# Altium PCB PCB4.pcbdoc
Units mil, origin at the board's own origin, x right, y up, seen from the top; angles counter-clockwise.
Board outline 8374.02 x 3816.29 mil, 2 copper layers (Top Layer, Bottom Layer); 98 components, 116 nets, 382 pads, 72 vias.
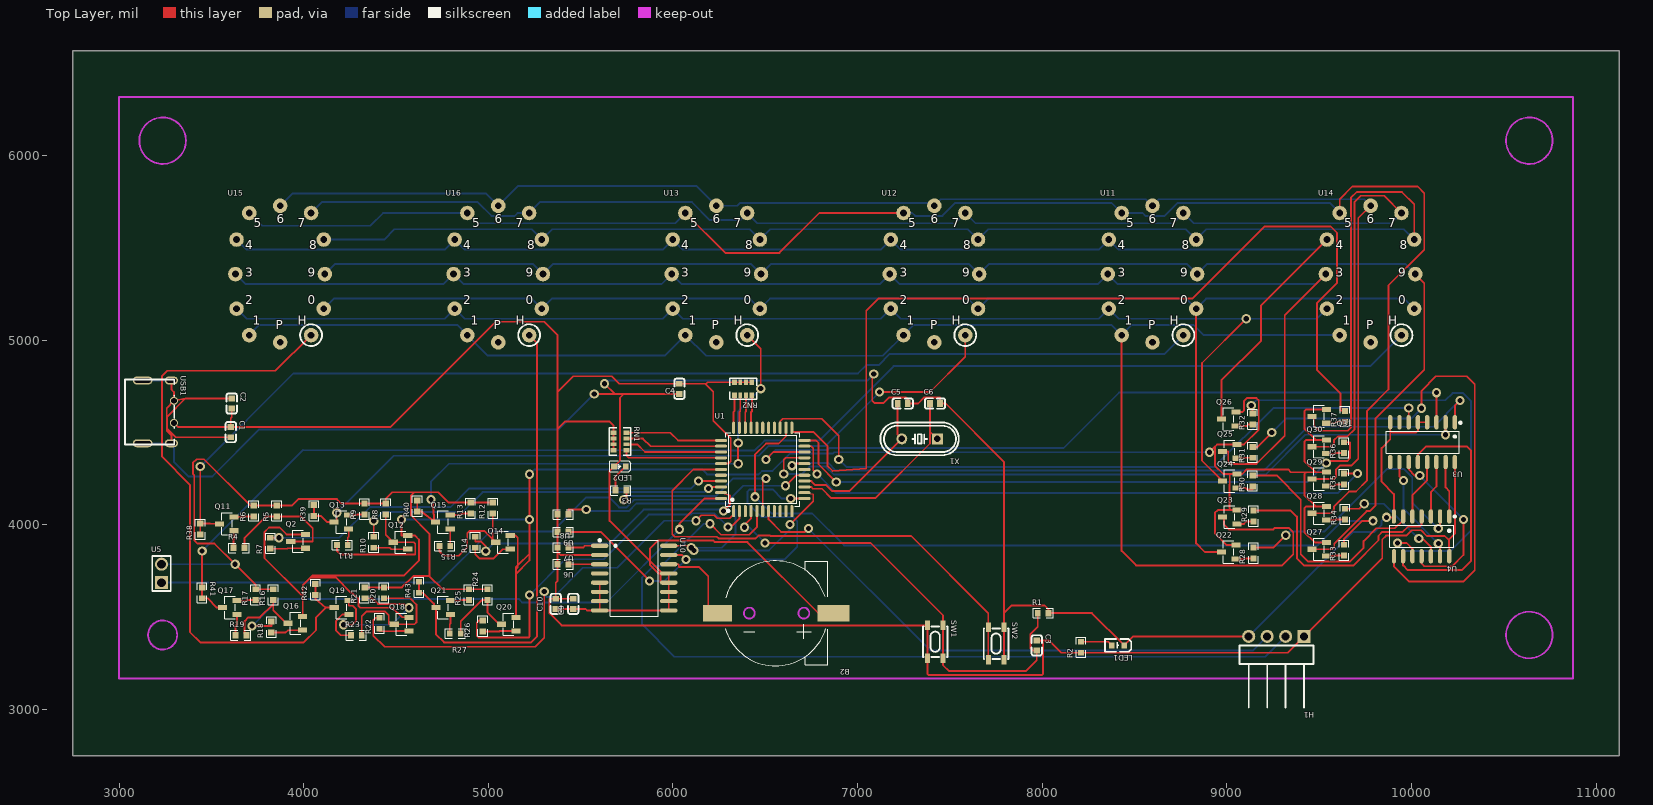
[diagram p0: Top Layer view]
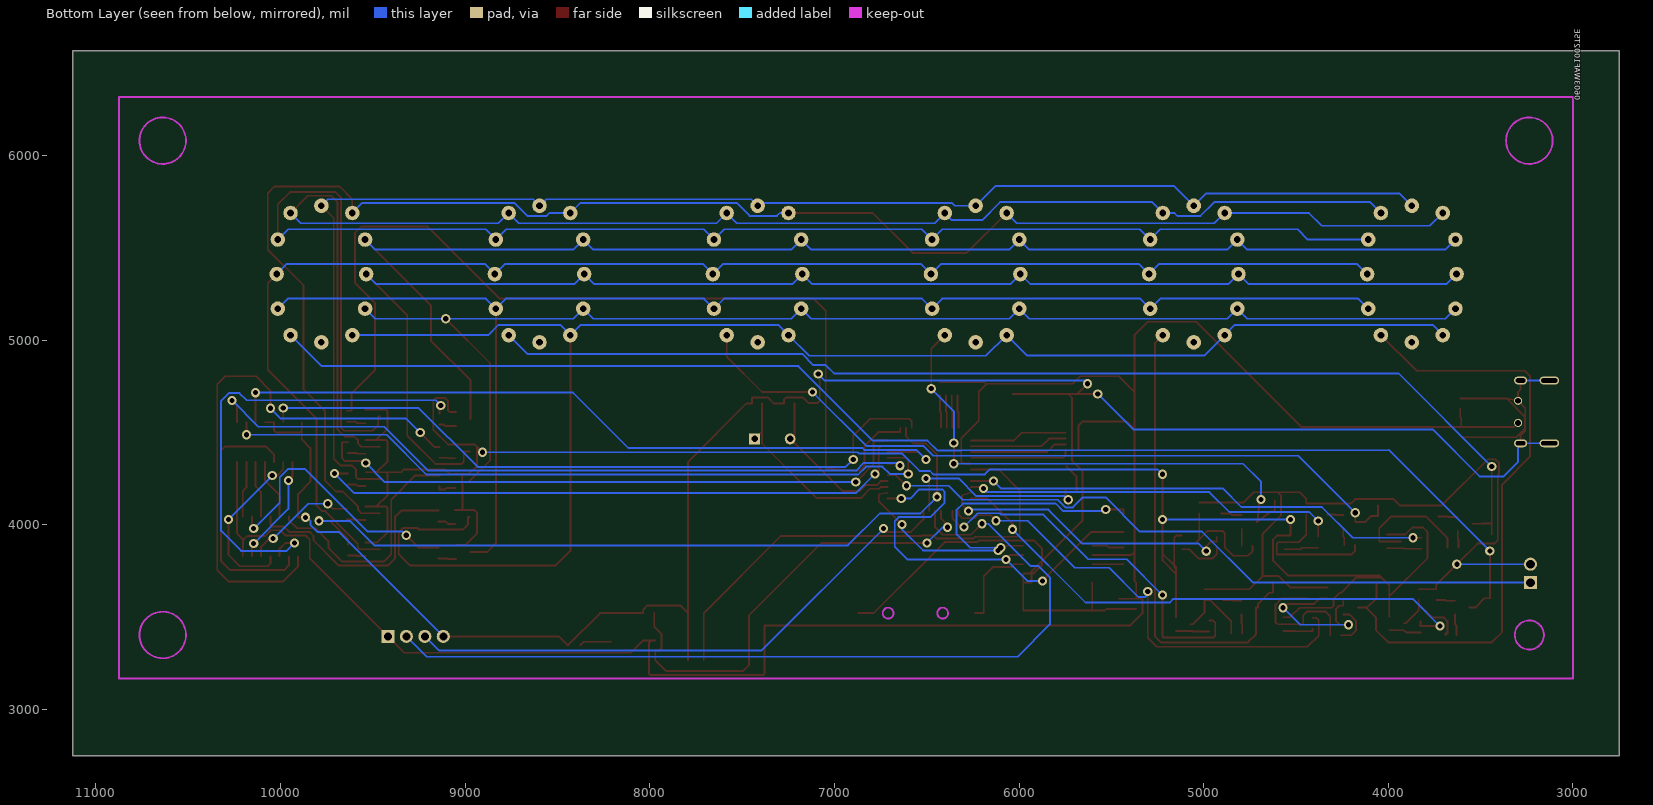
[diagram p1: Bottom Layer view, seen from below]

## Layer stack, top to bottom
Top Solder Mask Layer: solder mask 0.4, Solder Resist, Dk 3.5
Top Layer: signal copper 1.4
Dielectric1: dielectric 12.6, FR-4, Dk 4.8
Bottom Layer: signal copper 1.4
Bottom Solder Mask Layer: solder mask 0.4, Solder Resist, Dk 3.5

## Board outline
11124.02,2750 2750,2750 2750,6566.29 11124.02,6566.29

## Design rules (kind name [scope] priority, off if disabled: settings)
AssemblyTestPointUsage [All] p0: scope1count=1 scope1_0_kind=Board scope1_0_value=Board scope2count=1 scope2_0_kind=Board scope2_0_value=Board commentlength=0
AssemblyTestpoint [All] p0: scope1count=1 scope1_0_kind=Board scope1_0_value=Board scope2count=1 scope2_0_kind=Board scope2_0_value=Board commentlength=0
Clearance [All] p0: scope1count=1 scope1_0_kind=Board scope1_0_value=Board scope2count=1 scope2_0_kind=Board scope2_0_value=Board commentlength=0 gap=10
Clearance [All] p1: gap=10 ignorepadtopadclearanceinfootprint=FALSE except(0: Arc-Hole Track-Hole SMDPad-Hole THPad-Hole Via-Hole Fill-Hole Poly-Hole Region-Hole Text-Hole)
ComponentClearance [All] p0: scope1count=1 scope1_0_kind=Board scope1_0_value=Board scope2count=1 scope2_0_kind=Board scope2_0_value=Board commentlength=0 gap=10 collisioncheckmode=3
DiffPairsRouting [All] p0: scope1count=1 scope1_0_kind=Board scope1_0_value=Board scope2count=1 scope2_0_kind=Board scope2_0_value=Board commentlength=0
FabricationTestPointUsage [All] p0: scope1count=1 scope1_0_kind=Board scope1_0_value=Board scope2count=1 scope2_0_kind=Board scope2_0_value=Board commentlength=0 valid=0 allowmultiple=FALSE
FabricationTestpoint [All] p0: scope1count=1 scope1_0_kind=Board scope1_0_value=Board scope2count=1 scope2_0_kind=Board scope2_0_value=Board commentlength=0 side=3 testpointundercomponent=TRUE minsize=40 maxsize=100 preferedsize=60 minholesize=0 maxholesize=40 preferedholesize=32 testpointgrid=1
FanoutControl Fanout_BGA [All] p0 off: scope1count=1 scope1_0_kind=Board scope1_0_value=Board scope2count=1 scope2_0_kind=Board scope2_0_value=Board commentlength=69 // Protel DXP Scope 1 Expression Was: IsBGA   Fanout_BGA (Default Rule)
FanoutControl Fanout_LCC [All] p0 off: scope1count=1 scope1_0_kind=Board scope1_0_value=Board scope2count=1 scope2_0_kind=Board scope2_0_value=Board commentlength=69 // Protel DXP Scope 1 Expression Was: IsLCC   Fanout_LCC (Default Rule)
FanoutControl Fanout_SOIC [All] p0 off: scope1count=1 scope1_0_kind=Board scope1_0_value=Board scope2count=1 scope2_0_kind=Board scope2_0_value=Board commentlength=71 // Protel DXP Scope 1 Expression Was: IsSOIC   Fanout_SOIC (Default Rule)
FanoutControl Fanout_Small [All] p0 off: scope1count=1 scope1_0_kind=Board scope1_0_value=Board scope2count=1 scope2_0_kind=Board scope2_0_value=Board commentlength=84 // Protel DXP Scope 1 Expression Was: (CompPinCount < 5)   Fanout_Small (Default Rule)
FanoutControl Fanout_Default [All] p0: scope1count=1 scope1_0_kind=Board scope1_0_value=Board scope2count=1 scope2_0_kind=Board scope2_0_value=Board commentlength=30 // Fanout_Default (Default Rule)
Height [All] p0: scope1count=1 scope1_0_kind=Board scope1_0_value=Board scope2count=1 scope2_0_kind=Board scope2_0_value=Board commentlength=0
HoleSize [All] p0: scope1count=1 scope1_0_kind=Board scope1_0_value=Board scope2count=1 scope2_0_kind=Board scope2_0_value=Board commentlength=0 absolutevalues=TRUE maxlimit=100 minlimit=1 maxpercent=80.000 minpercent=20.000
HoleToHoleClearance [All] p0: scope1count=1 scope1_0_kind=Board scope1_0_value=Board scope2count=1 scope2_0_kind=Board scope2_0_value=Board commentlength=0
LayerPairs [All] p0: scope1count=1 scope1_0_kind=Board scope1_0_value=Board scope2count=1 scope2_0_kind=Board scope2_0_value=Board commentlength=0 enforce=TRUE
MinimumSolderMaskSliver [All] p0: scope1count=1 scope1_0_kind=Board scope1_0_value=Board scope2count=1 scope2_0_kind=Board scope2_0_value=Board commentlength=0
NetAntennae [All] p0: scope1count=1 scope1_0_kind=Board scope1_0_value=Board scope2count=1 scope2_0_kind=Board scope2_0_value=Board commentlength=0
PasteMaskExpansion [All] p0: scope1count=1 scope1_0_kind=Board scope1_0_value=Board scope2count=1 scope2_0_kind=Board scope2_0_value=Board commentlength=0 expansion=0
PlaneClearance [All] p0: scope1count=1 scope1_0_kind=Board scope1_0_value=Board scope2count=1 scope2_0_kind=Board scope2_0_value=Board commentlength=0 clearance=20
PlaneConnect [All] p0: scope1count=1 scope1_0_kind=Board scope1_0_value=Board scope2count=1 scope2_0_kind=Board scope2_0_value=Board commentlength=0 planeconnectstyle=Relief reliefexpansion=20 reliefentries=4 reliefconductorwidth=10 reliefairgap=10
PolygonConnect [All] p0: scope1count=1 scope1_0_kind=Board scope1_0_value=Board scope2count=1 scope2_0_kind=Board scope2_0_value=Board commentlength=0 connectstyle=Relief reliefconductorwidth=10 reliefentries=4 polygonreliefangle="90 Angle"
PolygonConnect [All] p1: connectstyle=Relief reliefconductorwidth=10 reliefentries=4 polygonreliefangle="90 Angle" airgapwidth=10
RoutingCorners [All] p0: scope1count=1 scope1_0_kind=Board scope1_0_value=Board scope2count=1 scope2_0_kind=Board scope2_0_value=Board commentlength=0 cornerstyle=45-Degree minsetback=100 maxsetback=100
RoutingLayers [All] p0: scope1count=1 scope1_0_kind=Board scope1_0_value=Board scope2count=1 scope2_0_kind=Board scope2_0_value=Board commentlength=0 top layer=Automatic bottom layer=Automatic
RoutingPriority [All] p0: scope1count=1 scope1_0_kind=Board scope1_0_value=Board scope2count=1 scope2_0_kind=Board scope2_0_value=Board commentlength=0
RoutingTopology [All] p0: scope1count=1 scope1_0_kind=Board scope1_0_value=Board scope2count=1 scope2_0_kind=Board scope2_0_value=Board commentlength=0 topology=Shortest
RoutingVias [All] p0: scope1count=1 scope1_0_kind=Board scope1_0_value=Board scope2count=1 scope2_0_kind=Board scope2_0_value=Board commentlength=0 holewidth=28 width=50 viastyle="Through Hole" minholewidth=28 minwidth=50 maxholewidth=28 maxwidth=50
RoutingVias [All] p1: holewidth=28 width=50 viastyle="Through Hole" minholewidth=28 minwidth=50 maxholewidth=28 maxwidth=50
ShortCircuit [All] p0: scope1count=1 scope1_0_kind=Board scope1_0_value=Board scope2count=1 scope2_0_kind=Board scope2_0_value=Board commentlength=0 allowed=FALSE
SilkToBoardRegionClearance [All] p0: scope1count=1 scope1_0_kind=Board scope1_0_value=Board scope2count=1 scope2_0_kind=Board scope2_0_value=Board commentlength=0
SilkToSilkClearance [All] p0: scope1count=1 scope1_0_kind=Board scope1_0_value=Board scope2count=1 scope2_0_kind=Board scope2_0_value=Board commentlength=0
SilkToSolderMaskClearance [All] p0 off: scope1count=1 scope1_0_kind=Board scope1_0_value=Board scope2count=1 scope2_0_kind=Board scope2_0_value=Board commentlength=44 // Protel DXP Scope 1 Expression Was: IsPad
SolderMaskExpansion [All] p0: scope1count=1 scope1_0_kind=Board scope1_0_value=Board scope2count=1 scope2_0_kind=Board scope2_0_value=Board commentlength=0 expansion=4
SolderMaskExpansion [All] p1: expansion=4 istentingtop=FALSE
UnRoutedNet [All] p0: scope1count=1 scope1_0_kind=Board scope1_0_value=Board scope2count=1 scope2_0_kind=Board scope2_0_value=Board commentlength=0
UnpouredPolygon [All] p0: scope1count=1 scope1_0_kind=Board scope1_0_value=Board scope2count=1 scope2_0_kind=Board scope2_0_value=Board commentlength=0
Width [All] p0: scope1count=1 scope1_0_kind=Board scope1_0_value=Board scope2count=1 scope2_0_kind=Board scope2_0_value=Board commentlength=0 maxlimit=10 minlimit=10 preferedwidth=10
Width [All] p1: maxlimit=10 minlimit=10 preferedwidth=10
30 further rules are at their usual default settings.

## Components (designator, comment, footprint, x,y, rotation, side; value= is the part's Value field where it differs from the comment)
B2 "CR1220-2" BAT-SMD_CR1220-2 6555,3521.29 r180 top
C1 "CL10A106MP8NNNC" C0603#1 3605,4501.29 r270 top
C2 "CL10B104KB8NNNC" C0603#1 3610,4656.29 r270 top
C3 "CL10A106MP8NNNC" C0603#1 7970,3346.29 r270 top
C4 "CL10B104KB8NNNC" C0603#1 6035,4736.29 r270 top
C5 "0603CG220J500NT" C0603#1 7244.37,4656.55 r0 top
C6 "0603CG220J500NT" C0603#1 7419.37,4656.55 r0 top
C9 "CL10A105KB8NNNC" C0603#2 5460,3571.29 r90 top
C10 "CC0603KRX7R9BB104" C0603#2 5365,3571.29 r90 top
H1 "DZ254W-11-04-65" HDR-TH_4P-P2.54-H-M-W10.3 9268.04,3395.28 r180 top
LED1 "19-217/R6C-AL1M2VY/3T" LED0603-R-RD 8410,3346.29 r180 top
LED2 "LED_0603-B" LED0603-RD_BLUE 5712.81,4316.15 r180 top
Q2 "MMBTA42_C916394" SOT-23-3_L2.9-W1.3-P1.90-LS2.4-BR 3969.3,3910.05 r0 top
Q11 "MMBTA92_C916395" SOT-23-3_L2.9-W1.3-P1.90-LS2.4-BR 3584.3,4005.05 r0 top
Q12 "MMBTA42_C916394" SOT-23-3_L2.9-W1.3-P1.90-LS2.4-BR 4524.3,3905.05 r0 top
Q13 "MMBTA92_C916395" SOT-23-3_L2.9-W1.3-P1.90-LS2.4-BR 4204.3,4015.05 r0 top
Q14 "MMBTA42_C916394" SOT-23-3_L2.9-W1.3-P1.90-LS2.4-BR 5079.3,3905.05 r0 top
Q15 "MMBTA92_C916395" SOT-23-3_L2.9-W1.3-P1.90-LS2.4-BR 4754.3,4015.05 r0 top
Q16 "MMBTA42_C916394" SOT-23-3_L2.9-W1.3-P1.90-LS2.4-BR 3955,3466.29 r0 top
Q17 "MMBTA92_C916395" SOT-23-3_L2.9-W1.3-P1.90-LS2.4-BR 3600,3551.29 r0 top
Q18 "MMBTA42_C916394" SOT-23-3_L2.9-W1.3-P1.90-LS2.4-BR 4530,3461.29 r0 top
Q19 "MMBTA92_C916395" SOT-23-3_L2.9-W1.3-P1.90-LS2.4-BR 4205,3551.29 r0 top
Q20 "MMBTA42_C916394" SOT-23-3_L2.9-W1.3-P1.90-LS2.4-BR 5110,3461.29 r0 top
Q21 "MMBTA92_C916395" SOT-23-3_L2.9-W1.3-P1.90-LS2.4-BR 4755,3551.29 r0 top
Q22 "MMBTA42_C916394" SOT-23-3_L2.9-W1.3-P1.90-LS2.4-BR 9009.42,3852.28 r0 top
Q23 "MMBTA42_C916394" SOT-23-3_L2.9-W1.3-P1.90-LS2.4-BR 9014.42,4042.28 r0 top
Q24 "MMBTA42_C916394" SOT-23-3_L2.9-W1.3-P1.90-LS2.4-BR 9014.42,4237.28 r0 top
Q25 "MMBTA42_C916394" SOT-23-3_L2.9-W1.3-P1.90-LS2.4-BR 9014.42,4397.28 r0 top
Q26 "MMBTA42_C916394" SOT-23-3_L2.9-W1.3-P1.90-LS2.4-BR 9009.42,4572.28 r0 top
Q27 "MMBTA42_C916394" SOT-23-3_L2.9-W1.3-P1.90-LS2.4-BR 9499.42,3867.28 r0 top
Q28 "MMBTA42_C916394" SOT-23-3_L2.9-W1.3-P1.90-LS2.4-BR 9499.42,4062.28 r0 top
Q29 "MMBTA42_C916394" SOT-23-3_L2.9-W1.3-P1.90-LS2.4-BR 9499.42,4247.28 r0 top
Q30 "MMBTA42_C916394" SOT-23-3_L2.9-W1.3-P1.90-LS2.4-BR 9499.42,4422.28 r0 top
Q31 "MMBTA42_C916394" SOT-23-3_L2.9-W1.3-P1.90-LS2.4-BR 9499.42,4587.28 r0 top
R1 "RC0603JR-0710KL" R0603 8005,3521.29 r0 top
R2 "RC0603JR-0710KL" R0603 8210,3336.29 r90 top
R3 "RC0603JR-0710KL" R0603 5717.81,4186.15 r180 top
R4 "Res_0603" R0603 3649.3,3875.05 r0 top
R5 "Res_0603" R0603 3854.3,4075.05 r90 top
R6 "Res_0603" R0603 3729.3,4075.05 r90 top
R7 "Res_0603" R0603 3819.3,3900.05 r90 top
R8 "Res_0603" R0603 4444.3,4085.05 r90 top
R9 "Res_0603" R0603 4329.3,4085.05 r90 top
R10 "Res_0603" R0603 4379.3,3905.05 r90 top
R11 "Res_0603" R0603 4209.3,3890.05 r180 top
R12 "Res_0603" R0603 5024.3,4090.05 r90 top
R13 "Res_0603" R0603 4904.3,4090.05 r90 top
R14 "Res_0603" R0603 4929.3,3905.05 r90 top
R15 "Res_0603" R0603 4764.3,3885.05 r180 top
R16 "Res_0603" R0603 3835,3621.29 r90 top
R17 "Res_0603" R0603 3740,3621.29 r90 top
R18 "Res_0603" R0603 3825,3446.29 r90 top
R19 "Res_0603" R0603 3660,3401.29 r0 top
R20 "Res_0603" R0603 4435,3631.29 r90 top
R21 "Res_0603" R0603 4330,3631.29 r90 top
R22 "Res_0603" R0603 4410,3466.29 r90 top
R23 "Res_0603" R0603 4285,3401.29 r0 top
R24 "Res_0603" R0603 4995,3621.29 r90 top
R25 "Res_0603" R0603 4895,3621.29 r90 top
R26 "Res_0603" R0603 4970,3451.29 r90 top
R27 "Res_0603" R0603 4820.65,3411.46 r0 top
R28 "Res_0603" R0603 9144.42,3847.28 r90 top
R29 "Res_0603" R0603 9144.42,4047.28 r90 top
R30 "Res_0603" R0603 9139.42,4237.28 r90 top
R31 "Res_0603" R0603 9139.42,4392.28 r90 top
R32 "Res_0603" R0603 9139.42,4572.28 r90 top
R33 "Res_0603" R0603 9634.42,3862.28 r90 top
R34 "Res_0603" R0603 9639.42,4057.28 r90 top
R35 "Res_0603" R0603 9634.42,4247.28 r90 top
R36 "Res_0603" R0603 9634.42,4417.28 r90 top
R37 "Res_0603" R0603 9639.42,4587.28 r90 top
R38 "0603WAF1002T5E" R0603 3440,3976.29 r90 top
R39 "0603WAF1002T5E" R0603 4055,4076.29 r90 top
R40 "0603WAF1002T5E" R0603 4615,4101.29 r90 top
R41 "0603WAF1002T5E" R0603 3450,3631.29 r270 top
R42 "0603WAF1002T5E" R0603 4063.3,3649.38 r90 top
R43 "" R0603 4625,3661.29 r90 top
RN1 "yc164-jr-0710kl" res-array-smd_0603-8p-l3.2-w1.6-bl 5712.81,4451.15 r270 top
RN2 "yc164-jr-0710kl" res-array-smd_0603-8p-l3.2-w1.6-bl 6380,4736.29 r180 top
SW1 "PTS815SJK250SMTRLFS" SW-SMD_4P-L4.2-W3.3-P2.15-LS5.1 7420,3366.29 r270 top
SW2 "PTS815SJK250SMTRLFS" SW-SMD_4P-L4.2-W3.3-P2.15-LS5.1 7750,3356.29 r270 top
U1 "STC89C52RC-40I" LQFP-44_L10.0-W10.0-P0.80-LS12.0-BL 6486.04,4299.42 r0 top
U3 "74HC138D_C5205140" SOIC-16_L9.9-W3.9-P1.27-LS6.0-BL 10059.42,4447.28 r180 top
U4 "CD4069_C3041279" SOP-14_L8.8-W3.9-P1.27-LS6.0-BL 10054.42,3937.28 r180 top
U5 "54102-T0600LF" HDR-TH_2P-P2.54-V-M-R2-C1-S2.54 3230,3736.29 r0 top
U6 "AR03FTDX4701A" R0603 5405,3786.29 r180 top
U7 "AR03FTDX4701A" R0603 5405,3876.29 r180 top
U8 "AR03FTDX4701A" R0603 5405,4056.29 r180 top
U9 "AR03FTDX4701A" R0603 5405,3961.29 r180 top
U10 "DS3231SN#" SOIC-16_L10.3-W7.5-P1.27-LS10.3-BL 5790,3711.29 r270 top
U11 "IN-12A" IN-12 8596.89,5357.64 r0 top
U12 "IN-12A" IN-12 7415.79,5357.64 r0 top
U13 "IN-12A" IN-12 6234.68,5357.64 r0 top
U14 "IN-12A" IN-12 9777.99,5357.64 r0 top
U15 "IN-12A" IN-12 3872.48,5357.64 r0 top
U16 "IN-12A" IN-12 5053.58,5357.64 r0 top
USB1 "TYPE-C-31-M-33" USB-C-TH_TYPE-C-31-M-33 3212.6,4611.29 r270 top
X1 "B11059J019" HC-49US_L11.5-W4.5-P4.88 7335.49,4464.94 r180 top

## Footprints (in the part's own frame and the unit in brackets; to place one, negate y for a bottom-side part, rotate by r counter-clockwise, add the part's x,y. Pads: shape width x height; smd on the part's side, far side on the other; paste and mask are expansions set on the pad)
BAT-SMD_CR1220-2 [mm]
  rect 4.4x2.3 smd paste+0 mask+0: 1(-8,0)
  rect 4x2.3 smd paste+0 mask+0: 2(8,0)
  silkscreen extent -7.22,-7.19 6.92,7.25
C0603#1 [mm]
  rect 0.8x0.9 smd paste+0 mask+0: 1(-0.7,0) 2(0.7,0)
  silkscreen extent -1.41,-0.71 1.39,0.72
C0603#2 [mm]
  rect 0.8x0.9 smd: 1(-0.7,0) 2(0.7,0)
  silkscreen extent -1.41,-0.71 1.39,0.72
HC-49US_L11.5-W4.5-P4.88 [mil]
  rect 59.1x59.1 hole 35.4 paste+0 mask+0: 1(-96.1,0)
  round 59.1 hole 35.4 paste+0 mask+0: 2(96.1,0)
  silkscreen extent -212,-89 212,89
HDR-TH_2P-P2.54-V-M-R2-C1-S2.54 [mm]
  rect 1.8x1.8 hole 1.2: 1(0,-1.27)
  round 1.8 hole 1.2: 2(0,1.27)
  silkscreen extent -1.27,-2.41 1.27,2.41
HDR-TH_4P-P2.54-H-M-W10.3 [mm]
  rect 1.8x1.8 hole 1.1 paste+0 mask+0: 1(-3.81,0)
  round 1.8 hole 1.1 paste+0 mask+0: 2(-1.27,0) 3(1.27,0) 4(3.81,0)
  silkscreen extent -5.08,1.27 5.08,9.81
IN-12 [mm]
  round 2 hole 0.914 paste+0 mask+0: Hi(4.25,-8.4) N0(6,-4.75) N1(-4.25,-8.4) N2(-6,-4.75) N3(-6.15,0) N4(-6,4.75) N6(0,9.4) N7(4.25,8.4) N8(6,4.75) P(0,-9.4)
  round 2 hole 0.914 copper offset 0,0 paste+0 mask+0: N5(-4.25,8.4) N9(6.15,0)
  silkscreen extent 2.75,-9.9 5.75,-6.9
LED0603-R-RD [mm]
  rect 0.8x0.8 smd paste+0 mask+0: 1(0.851,0) 2(-0.851,0)
  silkscreen extent -1.82,-0.86 1.77,0.86
LED0603-RD_BLUE [mil]
  rect 31.5x31.5 smd paste+0 mask+0: 1(-31.5,-0.1) 2(31.5,0.1)
  silkscreen extent -59,-29 55,30
LQFP-44_L10.0-W10.0-P0.80-LS12.0-BL [mil]
  oval 16.5x65.7 smd paste+0 mask+0: 1(-157.5,-225.8) 2(-126,-225.8) 3(-94.5,-225.8) 4(-63,-225.8) 5(-31.5,-225.8) 6(0,-225.8) 7(31.5,-225.8) 8(63,-225.8) 9(94.5,-225.8) 10(126,-225.8) 11(157.5,-225.8) 23(157.5,225.8) 24(126,225.8) 25(94.5,225.8) 26(63,225.8) 27(31.5,225.8) 28(0,225.8) 29(-31.5,225.8) 30(-63,225.8) 31(-94.5,225.8) 32(-126,225.8) 33(-157.5,225.8)
  oval 65.7x16.5 smd paste+0 mask+0: 12(225.8,-157.5) 13(225.8,-126) 14(225.8,-94.5) 15(225.8,-63) 16(225.8,-31.5) 17(225.8,0) 18(225.8,31.5) 19(225.8,63) 20(225.8,94.5) 21(225.8,126) 22(225.8,157.5) 34(-225.8,157.5) 35(-225.8,126) 36(-225.8,94.5) 37(-225.8,63) 38(-225.8,31.5) 39(-225.8,0) 40(-225.8,-31.5) 41(-225.8,-63) 42(-225.8,-94.5) 43(-225.8,-126) 44(-225.8,-157.5)
  silkscreen extent -200,-230 200,200
R0603 [mil]
  rect 31.75x34.02 smd paste-3937.01 mask+0: 1(-29.66,0) 2(29.66,0)
  silkscreen extent -55,-26 55,26
res-array-smd_0603-8p-l3.2-w1.6-bl [mil]
  rect 25.6x31.5 smd paste+0 mask+0: 1(-47.2,-35.4) 4(47.2,-35.4) 5(47.2,35.4) 8(-47.2,35.4)
  rect 19.7x31.5 smd paste+0 mask+0: 2(-15.7,-35.4) 3(15.8,-35.4) 6(15.8,35.4) 7(-15.7,35.4)
  silkscreen extent -74,-57 74,58
SOIC-16_L9.9-W3.9-P1.27-LS6.0-BL [mil]
  oval 23.7x77.6 smd: 1(-175,-107.7) 2(-125,-107.7) 3(-75,-107.7) 4(-25,-107.7) 5(25,-107.7) 6(75,-107.7) 7(125,-107.7) 8(175,-107.7) 9(175,107.7) 10(125,107.7) 11(75,107.7) 12(25,107.7) 13(-25,107.7) 14(-75,107.7) 15(-125,107.7) 16(-175,107.7)
  silkscreen extent -211,-111 198,60
SOIC-16_L10.3-W7.5-P1.27-LS10.3-BL [mil]
  oval 22.6x94.51 smd: 1(-175,-187.02) 2(-125,-187.02) 3(-75,-187.02) 4(-25,-187.02) 5(25,-187.02) 6(75,-187.02) 7(125,-187.02) 8(175,-187.02) 9(175,187.02) 10(125,187.02) 11(75,187.02) 12(25,187.02) 13(-25,187.02) 14(-75,187.02) 15(-125,187.02) 16(-175,187.02)
  silkscreen extent -210,-193 206,131
SOP-14_L8.8-W3.9-P1.27-LS6.0-BL [mm]
  oval 0.595x1.968 smd: 1(-3.81,-2.734) 2(-2.54,-2.734) 3(-1.27,-2.734) 4(0,-2.734) 5(1.27,-2.734) 6(2.54,-2.734) 7(3.81,-2.734) 8(3.81,2.734) 9(2.54,2.734) 10(1.27,2.734) 11(0,2.734) 12(-1.27,2.734) 13(-2.54,2.734) 14(-3.81,2.734)
  silkscreen extent -4.71,-2.88 4.4,1.52
SOT-23-3_L2.9-W1.3-P1.90-LS2.4-BR [mm]
  rect 1.25x0.7 smd: 1(1,-0.95) 2(1,0.95) 3(-1,0)
  silkscreen extent -0.73,-1.53 0.73,1.53
SW-SMD_4P-L4.2-W3.3-P2.15-LS5.1 [mil]
  rect 51.2x27.6 smd paste+0 mask+0: 1(-88.6,42.3) 2(88.6,42.3) 3(-88.6,-42.3) 4(88.6,-42.3)
  silkscreen extent -83,-67 83,67
USB-C-TH_TYPE-C-31-M-33 [mm]
  oval 1.1x1.8 hole 0.6 slot 1.3 at 90 deg paste+0 mask+0: 3(4.32,1.8) 6(-4.32,1.8)
  oval 1.1x2.7 hole 0.6 slot 2.2 at 90 deg paste+0 mask+0: 4(4.32,-2.15) 5(-4.32,-2.15)
  round 1.1 hole 0.8 paste+0 mask+0: A9(1.52,2.15) B12(-1.52,2.15)
  silkscreen extent -4.47,-4.6 4.47,2.2

## Via types
v1: diameter 50, hole 28, Top Layer to Bottom Layer, 72 vias

## Nets (pads, with @x,y where several pads share a name; then routed paths per layer and width w, separated by ;. In a path a pad name is that pad's centre, name@x,y a point inside that pad or via, vN(x,y) a via of type N, cw(c..) or ccw(c..) an arc to the next point about the centre after c; other vN are vias at no path point)
32K: U7.1 U10.1 | length 172.5
  Top Layer w10: U7.1 5513,3876.29 5523,3886.29 U10.1
$1N1351: LED1.1 R2.2 | length 174.6
  Top Layer w10: R2.2 8356.84,3365.95 LED1.1
$1N1355: LED2.1 R3.2 | length 153.4
  Top Layer w10: R3.2 5688.15,4260.09 LED2.1
$1N2619: Q11.2 R6.1 | length 106.8
  Top Layer w10: Q11.2 3675,4042.45 3677.94,4045.39 R6.1
$1N2621: Q2.1 R7.1 | length 190.3
  Top Layer w10: R7.1 3912,3870.39 3914.26,3872.65 Q2.1
$1N2624: Q2.3 R4.2 R5.1 | length 687.7
  Top Layer w10: R4.2 3678.96,3927.96 3796.39,4045.39 R5.1 3983.61,4045.39 4049,3980 4049,3910.05 Q2.3
$1N2625: Q11.1 R4.1 | length 94.3
  Top Layer w10: R4.1 3619.64,3919 3623.67,3923.03 Q11.1
$1N3048: Q13.2 R9.1 | length 86.8
  Top Layer w10: Q13.2 4285,4052.45 4287.94,4055.39 R9.1
$1N3050: Q12.1 R10.1 | length 187.6
  Top Layer w10: R10.1 4467,3875.39 4474.74,3867.65 Q12.1
$1N3052: Q12.3 R8.1 R11.2 | length 813.1
  Top Layer w10: R11.2 4179.64,3858.36 4200,3838 4604,3838 4604,3897 4595.95,3905.05 Q12.3 4444.3,3945.68 R8.1
$1N3053: Q13.1 R11.1 | length 89.6
  Top Layer w10: R11.1 4238.96,3931 4243.67,3935.71 Q13.1
$1N3261: Q15.2 R13.1 | length 113.9
  Top Layer w10: Q15.2 4845,4052.45 4852.94,4060.39 R13.1
$1N3263: Q14.1 R14.1 | length 255.9
  Top Layer w10: R14.1 4929.3,3840 4953.02,3816.27 5027.74,3816.27 5079.12,3867.65 Q14.1
$1N3265: Q14.3 R12.1 R15.2 | length 608.7
  Top Layer w10: R15.2 4734.64,3857.36 4760,3832 4840,3832 4886,3878 4886,3953 4900,3967 4977.98,3967 5024.3,3920.68 ; R12.1 5024.3,3920.68 ; Q14.3 5024.3,3920.68
$1N3266: Q15.1 R15.1 | length 92.7
  Top Layer w10: Q15.1 4793.67,3931.29 4793.96,3931 R15.1
$1N3474: Q17.2 R17.1 | length 101.8
  Top Layer w10: Q17.2 3688,3588.69 3690.94,3591.63 R17.1
$1N3476: Q16.1 R18.1 | length 174.4
  Top Layer w10: R18.1 3903,3416.63 3915.26,3428.89 Q16.1
$1N3478: Q16.3 R16.1 R19.2 | length 444.6
  Top Layer w10: R19.2 3689.66,3410.18 3679.99,3410.18 3679.99,3478.19 3700,3498.19 3763.19,3498.19 3835,3570 ; R16.1 3835,3570 ; Q16.3 3905,3466.29 3835,3536.29 3835,3570
$1N3479: Q17.1 R19.1 | length 116.3
  Top Layer w10: R19.1 3630.34,3453 3639.37,3462.03 Q17.1
$1N3687: Q19.2 R21.1 | length 869.1
  Top Layer w10: v1(4216,3458) 4262,3458 4284,3480 4284,3543 4266,3561 4244,3561 4244,3588.69 Q19.2 ; R21.1 4372,3601.63 4402.88,3570.76 4545,3570.76 4565.76,3550 v1(4570,3550)
  Bottom Layer w10: v1(4216,3458) 4478,3458 v1(4570,3550)
$1N3689: Q18.1 R22.1 | length 173.4
  Top Layer w10: R22.1 4410,3423 4502,3423 4502.89,3423.89 Q18.1
$1N3691: Q18.3 R20.1 R23.2 | length 756
  Top Layer w10: R23.2 4314.66,3503.66 4341.76,3530.76 4440,3530.76 4460.72,3510.04 4460.72,3461.29 Q18.3 4600,3461.29 4610,3471.29 4610,3568 4576.37,3601.63 R20.1
$1N3692: Q19.1 R23.1 | length 227.6
  Top Layer w10: Q19.1 4208.78,3513.89 4175.34,3480.45 4175.34,3425.95 4200,3401.29 R23.1
$1N3900: Q21.2 R25.1 | length 101.8
  Top Layer w10: Q21.2 4843,3588.69 4845.94,3591.63 R25.1
$1N3902: Q20.1 R26.1 | length 180.3
  Top Layer w10: R26.1 5058,3421.63 5060.26,3423.89 Q20.1
$1N3904: Q20.3 R24.1 R27.2 | length 426.2
  Top Layer w10: R27.2 4850.31,3477.94 4964,3591.63 R24.1 4995,3526.29 5060,3461.29 Q20.3
$1N3905: Q21.1 R27.1 | length 103.8
  Top Layer w10: R27.1 4790.99,3460 4794.37,3463.38 Q21.1
$1N4218: Q22.1 R28.1 | length 96.8
  Top Layer w10: Q22.1 9095,3814.88 9097.74,3817.62 R28.1
$1N4332: Q23.1 R29.1 | length 95.9
  Top Layer w10: Q23.1 9092,4004.88 9104.74,4017.62 R29.1
$1N4415: Q24.1 R30.1 | length 107.3
  Top Layer w10: Q24.1 9099.53,4199.88 9109.42,4190 9139.42,4190 R30.1
$1N4498: Q25.1 R31.1 | length 86.8
  Top Layer w10: Q25.1 9095,4359.88 9097.74,4362.62 R31.1
$1N4581: Q26.1 R32.1 | length 93.8
  Top Layer w10: Q26.1 9108.56,4534.88 9116.3,4542.62 R32.1
$1N4664: Q27.1 R33.1 | length 96.8
  Top Layer w10: Q27.1 9585,3829.88 9587.74,3832.62 R33.1
$1N4747: Q28.1 R34.1 | length 101.8
  Top Layer w10: Q28.1 9587,4024.88 9589.74,4027.62 R34.1
$1N4830: Q29.1 R35.1 | length 98.8
  Top Layer w10: Q29.1 9582,4209.88 9589.74,4217.62 R35.1
$1N4913: Q30.1 R36.1 | length 96.8
  Top Layer w10: Q30.1 9585,4384.88 9587.74,4387.62 R36.1
$1N4996: Q31.1 R37.1 | length 103.8
  Top Layer w10: Q31.1 9585,4549.88 9592.74,4557.62 R37.1
+5V: C1.1 C2.2 C3.1 C4.1 C9.2 C10.2 H1.1 R2.1 RN1.1 RN1.2 RN1.3 RN1.4 RN2.1 RN2.2 RN2.3 RN2.4 SW1.3 SW1.4 U1.38 U3.16 U4.14 U6.2 U7.2 U8.2 U9.2 U10.2 USB1.A9 | length 12813.2
  Top Layer w10: USB1.A9 3319.83,4528.85 C1.1 ; C2.2 3610,4581 3605,4576 C1.1 ; C9.2 C10.2 ; U10.2 5389.05,3836.29 5375.34,3850 ; RN1.4 RN1.3 RN1.2 RN1.1 5677.41,4538.59 5656,4560 5415.34,4560 5375.34,4520 ; U1.38 6300,4330.92 6313,4343.92 6313,4469 6218,4564 6218,4720 6174.15,4763.85 ; RN2.1 RN2.2 RN2.3 RN2.4 6186.84,4771.69 6179,4763.85 6174.15,4763.85 ; C3.1 7990,3373.85 ; U3.16 10234.42,3951.01 10201.2,3917.8 ; C1.1 4469.85,4528.85 5040,5099 5302,5099 5375.34,5025.66 5375.34,4720 ; C10.2 5332,3598.85 5332,3520 5397,3455 7377.7,3455 SW1.3 SW1.4 7377.7,3192 7382.7,3187 8000,3187 8003,3190 8003,3360.85 7990,3373.85 ; C10.2 5365,3687 5375.34,3697.34 U6.2 5375.34,3850 ; 5375.34,3850 U7.2 U9.2 U8.2 5375.34,4520 ; 5375.34,4520 5375.34,4720 ; 5375.34,4720 5459.34,4804 5669,4804 5709.15,4763.85 C4.1 6174.15,4763.85 ; 7990,3373.85 8036,3373.85 8103.22,3306.63 R2.1 9329.4,3306.63 H1.1 9841,3818.24 9841,3920 9862,3941 9971,3941 10000,3970 10052,3970 10083,3939 10180,3939 10201.2,3917.8 ; 10201.2,3917.8 10204.41,3914.59 U4.14 10201.2,3917.8
BAT: B2.2 U10.14 | length 497.6
  Top Layer w10: U10.14 6031,3786.29 6031,3772 6139,3772 6191,3720 6191,3521.29 B2.2
CN0: R28.2 U4.2 | length 1459.7
  Top Layer w10: R28.2 9252.94,3876.94 v1(9319,3943) ; v1(10145,3979) 10154.41,3988.41 U4.2
  Bottom Layer w10: v1(9319,3943) 9339,3963 9528,3963 9866,4301 9960,4301 10004,4257 10004,4120 v1(10145,3979)
CN1: R29.2 U4.4 | length 1316.4
  Top Layer w10: R29.2 9346,4076.94 9379,4043.94 9379,3818 9418,3779 9683.68,3779 9821,3916.32 9821,3940 9842,3961 9952.49,3961 9982.1,3990.6 10045.61,3990.6 10054.41,3999.41 U4.4
CN2: R30.2 U4.6 | length 1316
  Top Layer w10: R30.2 9269.06,4266.94 9400,4136 9400,3840 9440,3800 9664.68,3800 9739.9,3875.22 9739.9,3911.7 9809.2,3981 9910,3981 9954.41,4025.41 U4.6
CN3: R31.2 U4.8 | length 2992.4
  Top Layer w10: R31.2 9165.94,4421.94 v1(9243,4499) ; U4.8 9904.41,3776 9988.41,3692 10280,3692 10342,3754 10342,4760 10298,4804 10132,4804 10054,4726 v1(10054,4631)
  Bottom Layer w10: v1(9243,4499) 9319,4575 9998,4575 v1(10054,4631)
CN4: R32.2 U4.10 | length 2580.6
  Top Layer w10: v1(9132,4646) 9139.42,4638.58 R32.2 ; v1(9924,3901) 9974,3901 10004.41,3870.59 U4.10
  Bottom Layer w10: v1(9132,4646) 9160,4674 10183,4674 10222,4713 10280,4713 10321.27,4671.73 10321.27,3966.27 10213,3858 9967,3858 v1(9924,3901)
CN5: R34.2 U4.12 | length 623.5
  Top Layer w10: R34.2 9716.94,4086.94 v1(9744,4114) ; v1(10039.41,3925) 10059.41,3925 10104.41,3880 U4.12
  Bottom Layer w10: v1(9744,4114) 9850.41,4114 v1(10039.41,3925)
GND: U1.16 U5.1 | length 3767.5
  Top Layer w10: v1(6610,4211) 6666.92,4267.92 U1.16
  Bottom Layer w10: U5.1 4732.29,3686.29 5009,3963 5345,3963 5530.21,4148.21 5654.34,4148.21 5708.41,4094.14 5749.69,4094.14 5790.55,4135 6305.45,4135 6381.45,4211 v1(6610,4211)
GND1: Q2.2 Q12.2 Q14.2 Q16.2 Q18.2 Q20.2 Q22.2 Q23.2 Q24.2 Q25.2 Q26.2 Q27.2 Q28.2 Q29.2 Q30.2 Q31.2 | length 11308.5
  Top Layer w10: Q16.2 3995,3503.69 3995,3612 ; Q2.2 3906.89,3947.45 3869.35,3985 3812,3985 3787,3960 3787,3820 3995,3612 ; v1(4529,4029) 4529,3942.45 Q12.2 4601.55,3942.45 4624,3920 4624,3805.65 4544.35,3726 4049,3726 4038,3715 ; Q18.2 4532.78,3498.69 4480.72,3550.76 4305.63,3550.76 4296.01,3560.38 4296.01,3600 4264.01,3632 4256,3632 4173,3715 4038,3715 ; Q14.2 5146.55,3942.45 5159,3930 5159,3780 ; Q20.2 5149,3498.69 5149,3733 ; v1(5223,4273) v1(5223,4029) 5223,3844 ; v1(8905,4393) 8935,4423 ; Q22.2 9000,3889.68 8935,3954.68 8935,4064.68 8950,4079.68 9024.32,4079.68 ; Q26.2 9083.68,4609.68 9092,4618 9092,4670 9108,4686 9160,4686 9172,4674 9172,4515 9091.68,4434.68 Q25.2 8946.68,4434.68 8935,4423 ; Q23.2 9024.32,4079.68 ; Q27.2 9475.32,3904.68 9420,3960 9420,4089.68 9430,4099.68 9480,4099.68 ; Q28.2 9480,4099.68 ; Q29.2 9480,4284.68 ; Q30.2 9480,4459.68 ; Q31.2 9430,4624.68 9420,4614.68 9420,4519.68 9480,4459.68 ; 3995,3612 3995,3672 4038,3715 ; 5149,3733 5149,3759 ; 5149,3733 5223,3807 5223,3844 ; 5149,3759 5149,3770 5159,3780 ; 5149,3759 5159,3769 5159,3780 ; 5159,3780 5223,3844 ; 8935,4423 8935,4320 8980.32,4274.68 9015,4274.68 ; 9015,4274.68 Q24.2 9083,4274.68 9108.32,4300 9331,4300 9346.32,4284.68 9430,4284.68 ; 9015,4274.68 9015,4220 9014,4219 9014,4090 9024.32,4079.68 ; 9430,4284.68 9480,4284.68 ; 9430,4284.68 9420,4274.68 9420,4159.68 9480,4099.68 ; 9480,4284.68 9420,4344.68 9420,4449.68 9430,4459.68 9480,4459.68
  Bottom Layer w10: v1(4529,4029) v1(5223,4029) ; v1(5223,4273) 5250,4300 6158,4300 6185,4273 6464,4273 6482.09,4291.09 6538.09,4291.09 6632.61,4385.61 6865.99,4385.61 6873.38,4393 v1(8905,4393)
GND2: B2.1 C1.2 C2.1 C4.2 C5.2 C6.2 C9.1 C10.1 H1.4 LED1.2 LED2.2 R1.2 SW2.1 SW2.2 U3.4 U3.5 U3.8 U4.7 U10.5 U10.6 U10.7 U10.8 U10.9 U10.10 U10.11 U10.12 U10.13 USB1.3 USB1.4 USB1.5 USB1.6 USB1.B12 | length 15262.4
  Top Layer w10: USB1.3 3283.47,4483.53 3258,4509 3258,4631.89 USB1.B12 ; USB1.6 3283.47,4732.78 3297.25,4719 USB1.B12 ; C1.2 3306.27,4473.73 3260,4520 3260,4584 3359.85,4683.85 ; C2.1 3359.85,4683.85 ; C10.1 C9.1 5527,3543.73 5534.44,3536.29 U10.8 ; v1(5573.73,4708.73) 5684.27,4708.73 ; U10.5 U10.6 U10.7 U10.8 ; v1(5629,4764) 5684.27,4708.73 ; C4.2 5733.73,4708.73 ; B2.1 6788.13,3521.29 6403.42,3906 6227,3906 6218,3915 5919,3915 5876,3872 5876,3802 ; v1(7087,4817) 7079,4809 7079,4672 7091,4660 7141,4660 7171,4690 7261.93,4690 7271.93,4680 C5.2 7328.34,4656.55 7361.06,4689.27 7446.93,4689.27 C6.2 7477,4656.55 7792.3,4341.25 7792.3,3520 ; SW2.2 SW2.1 7792.3,3520 ; H1.4 8492.48,3395.28 LED1.2 8268.5,3521.29 R1.2 8034.66,3540.34 8012,3563 7835.3,3563 7792.3,3520 ; v1(9863.52,4040) 9904.41,4040 U4.7 9904.41,4165.59 9837.56,4232.44 9837.56,4415.15 9884.42,4462 9884.42,4510 ; U3.8 9884.42,4510 ; U3.4 U3.5 10034.42,4510 10024.42,4500 9894.42,4500 9884.42,4510 ; USB1.B12 3359.85,4683.85 ; U10.8 U10.9 U10.10 U10.11 U10.12 ; 5684.27,4708.73 5733.73,4708.73 ; 5733.73,4708.73 5713,4688 5713,4347.74 LED2.2 5657,4291.74 5657,4021 5876,3802 ; 5876,3802 5876,3780.29 5920,3736.29 U10.13@5933,3736.29 ; 5876,3802 5933,3745 U10.13@5933,3736.29 ; U10.13@5933,3736.29 5933,3686.29 U10.12 ; U10.13@5933,3736.29 U10.13 U10.12
  Bottom Layer w10: USB1.4 USB1.3 3297,4441.22 3297,4340 3375,4262 3506,4262 3760,4516 5381,4516 v1(5573.73,4708.73) ; USB1.5 USB1.6 ; v1(5629,4764) 5646,4781 7051,4781 v1(7087,4817) ; H1.4 9683.95,3961.19 9800,3961.19 9836.52,3997.71 9836.52,4020 9856.52,4040 v1(9863.52,4040)
HC0: U3.15 U4.1 | length 302.9
  Top Layer w10: U3.15 10184.42,4201.99 10204.41,4182 U4.1
HC1: U3.14 U4.3 | length 307.1
  Top Layer w10: U4.3 10104.41,4177 10134.42,4207.01 U3.14
HC2: U3.13 U4.5 | length 327.8
  Top Layer w10: U4.5 10004.41,4159.99 10084.42,4240 U3.13
HC3: U3.12 U4.9 | length 1400.8
  Top Layer w10: U4.9 9954.41,3779.59 9980,3754 10272,3754 10321.27,3803.27 10321.27,4402.73 10300,4424 10080,4424 10034.42,4378.42 U3.12
HC4: U3.11 U4.11 | length 939.1
  Top Layer w10: U3.11 9984.42,4300 10018.42,4266 v1(10044,4266) ; U4.11 10054.41,3790 10069.41,3775 10220,3775 10281,3836 v1(10281,4029)
  Bottom Layer w10: v1(10044,4266) v1(10281,4029)
HC5: U3.10 U4.13 | length 601.1
  Top Layer w10: U3.10 9934.42,4261.58 v1(9957,4239) ; v1(10145,3898) 10154.41,3888.59 U4.13
  Bottom Layer w10: v1(9957,4239) 9957,4086 v1(10145,3898)
HC6: U3.9
NO0: Q22.3 U11.N0 U12.N0 U13.N0 U14.N0 U15.N0 U16.N0 | length 7558.6
  Top Layer w10: U11.N0 8833.11,3899.17 8880,3852.28 Q22.3
  Bottom Layer w10: U15.N0 4163.08,5225 5235.42,5225 U16.N0 5344.19,5225 6416.52,5225 U13.N0 6525.29,5225 7597.63,5225 U12.N0 7706.39,5225 8778.73,5225 U11.N0 8887.49,5225 9959.83,5225 U14.N0
NO1: Q23.3 U11.N1 U12.N1 U13.N1 U14.N1 U15.N1 U16.N1 | length 8951.7
  Top Layer w10: U11.N1 8429.56,3858.44 8508,3780 9299,3780 9359,3840 9359,3960 9336,3983 9260,3983 9252,3975 9010,3975 8985,4000 8985,4042.28 Q23.3
  Bottom Layer w10: U15.N1 3760.23,5082 4831.18,5082 U16.N1 4997.18,4916 5956.43,4916 U13.N1 6179.29,4915 7136.54,4915 U12.N1 7303.54,5082 8374.49,5082 U11.N1 8484.64,5082 8819,5082 8874.07,5026.93 U14.N1
NO2: Q24.3 U11.N2 U12.N2 U13.N2 U14.N2 U15.N2 U16.N2 | length 7155.5
  Top Layer w10: Q24.3 8865,4347.33 8865,4876 v1(9105,5116)
  Bottom Layer w10: U15.N2 3690.88,5116 4762.74,5116 U16.N2 4871.98,5116 5943.84,5116 U13.N2 6053.08,5116 7124.95,5116 U12.N2 7234.18,5116 8306.05,5116 U11.N2 8415.28,5116 v1(9105,5116) 9487.15,5116 U14.N2
NO3: Q25.3 U11.N3 U12.N3 U13.N3 U14.N3 U15.N3 U16.N3 | length 7562.9
  Top Layer w10: Q25.3 9007,4397.28 9007,4340 9018,4329 9160,4329 9313,4482 9313,5134.77 U14.N3
  Bottom Layer w10: U15.N3 3684.99,5303 4756.82,5303 U16.N3 4866.09,5303 5937.92,5303 U13.N3 6047.19,5303 7119.03,5303 U12.N3 7228.3,5303 8300.13,5303 U11.N3 8409.4,5303 9481.23,5303 U14.N3
NO4: Q26.3 U11.N4 U12.N4 U13.N4 U14.N4 U15.N4 U16.N4 | length 7341.1
  Top Layer w10: Q26.3 8970,4782 9185,4997 9185,5187.87 U14.N4
  Bottom Layer w10: U15.N4 3690.89,5490 4762.72,5490 U16.N4 4872,5490 5943.83,5490 U13.N4 6053.1,5490 7124.93,5490 U12.N4 7234.2,5490 8306.03,5490 U11.N4 8415.3,5490 9487.13,5490 U14.N4
NO5: Q28.3 U11.N5 U12.N5 U13.N5 U14.N5 U15.N5 U16.N5 | length 8946.4
  Top Layer w10: U13.N5 6283.71,5472 6576,5472 6792.35,5688.35 U12.N5 ; Q28.3 9561.28,4062.28 9579,4080 9579,4097 9662,4180 9699,4180 9759,4240 9759,4617 9875,4733 9875,5296 10069,5490 10069,5795 10032,5832 9680,5832 9610.67,5762.67 U14.N5
  Bottom Layer w10: U15.N5 3774.5,5619 4361,5619 4430.35,5688.35 U16.N5 4941.61,5633 6012.01,5633 U13.N5 ; U12.N5 7295.65,5688.35 7311,5673 7459,5673 7529,5743 8374.91,5743 U11.N5 8543,5688.35 8558.35,5673 8663,5673 8732.72,5742.72 9556.3,5742.72 U14.N5
NO6: Q29.3 U11.N6 U12.N6 U13.N6 U14.N6 U15.N6 U16.N6 | length 7846.2
  Top Layer w10: Q29.3 9580,4247.28 9590,4257.28 9590,4298 9612,4320 9674,4320 9711.42,4357.42 9711.42,5661.15 U14.N6
  Bottom Layer w10: U15.N6 3937.76,5793 4988.3,5793 U16.N6 5159.86,5834 6128.4,5834 U13.N6 6348,5727.72 6363.28,5743 7415.79,5743 U12.N6 7451.07,5763 8561.61,5763 U11.N6 8631.89,5762.72 9742.99,5762.72 U14.N6
NO7: Q30.3 U11.N7 U12.N7 U13.N7 U14.N7 U15.N7 U16.N7 | length 8004.6
  Top Layer w10: Q30.3 9561.28,4422.28 9579,4440 9579,4457 9600,4478 9652,4478 9691.42,4517.42 9691.42,5749.51 9724,5782.09 9851.57,5782.09 U14.N7
  Bottom Layer w10: U15.N7 4098.45,5747 4943,5747 5018,5672 5142,5672 5158.35,5688.35 U16.N7 5279.56,5747 6103,5747 6200,5650 6363.66,5650 U13.N7 6457.35,5633 7527.76,5633 U12.N7 7638.46,5633 8708.86,5633 U11.N7 8819.56,5633 9889.97,5633 U14.N7
NO8: Q31.3 U11.N8 U12.N8 U13.N8 U14.N8 U15.N8 U16.N8 | length 8232.6
  Top Layer w10: Q31.3 9470,4587.28 9470,4539 9500,4509 9654.42,4509 9671.42,4526 9671.42,5769.89 9703.62,5802.09 9947.91,5802.09 10014.21,5735.79 U14.N8
  Bottom Layer w10: U15.N8 4435.64,5544.64 4491,5600 5234.44,5600 U16.N8 5345.17,5600 6415.54,5600 U13.N8 6526.27,5600 7596.65,5600 U12.N8 7707.38,5600 8777.75,5600 U11.N8 8888.48,5600 9958.85,5600 U14.N8
NO9: Q27.3 U11.N9 U12.N9 U13.N9 U14.N9 U15.N9 U16.N9 | length 7972
  Top Layer w10: Q27.3 9570,3867.28 9581,3878.28 9581,3898 9756.52,4073.52 9773.52,4073.52 9804,4104 9804,4575 10069,4840 10069,5308.75 U14.N9
  Bottom Layer w10: U15.N9 4169.97,5413 5240.34,5413 U16.N9 5351.07,5413 6421.44,5413 U13.N9 6532.17,5413 7602.55,5413 U12.N9 7713.28,5413 8783.65,5413 U11.N9 8894.38,5413 9964.75,5413 U14.N9
O1: Q11.3 R38.1 R38.2 U11.Hi | length 6092.8
  Top Layer w10: R38.1 R38.2 ; v1(3440,4315) R38.2 ; Q11.3 3492.9,4005.05 3492,4005.95 R38.2
  Bottom Layer w10: v1(3440,4315) 3944,4819 7001.45,4819 7047,4864.55 7114.55,4864.55 7175,4925 8662.28,4925 U11.Hi
O2: Q13.3 R39.1 R39.2 U12.Hi | length 4117.3
  Top Layer w10: R39.2 R39.1 4094,4046.63 4125.58,4015.05 Q13.3 4179,4015.05 v1(4179,4065) ; v1(7119,4719) 7392,4719 7583.11,4910.11 U12.Hi
  Bottom Layer w10: v1(4179,4065) 4488,4374 6464,4374 6515.61,4425.61 6825.61,4425.61 v1(7119,4719)
O3: Q15.3 R40.1 R40.2 U13.Hi | length 2881.8
  Top Layer w10: R40.2 R40.1 4636,4071.63 Q15.3@4709,4015.05 ; v1(4689,4136) 4697,4128 Q15.3@4709,4015.05 ; Q15.3 Q15.3@4709,4015.05 ; v1(6353,4330) v1(6353,4442) ; U13.Hi 6475,4953.93 v1(6475,4737)
  Bottom Layer w10: v1(4689,4136) 4689,4232 4787,4330 v1(6353,4330) ; v1(6353,4442) 6353,4615 v1(6475,4737)
O4: Q17.3 R41.1 R41.2 U14.Hi | length 7368.5
  Top Layer w10: v1(3450,3858) R41.1 R41.2 3480,3601.63 3530.34,3551.29 Q17.3
  Bottom Layer w10: v1(3450,3858) 3996,4404 6313,4401.15 6441.15,4401.15 6495.61,4455.61 6791.6,4455.61 7194.99,4859 9777.39,4859 U14.Hi
O5: Q19.3 R42.1 R42.2 U15.Hi | length 3425.1
  Top Layer w10: U15.Hi 3846.88,4834 3260,4834 3233,4807 3233,4368 3384,4217 3384,3419 3440,3363 4000,3363 4067,3430 4067,3498.29 4120,3551.29 ; R42.2 R42.1 4063.3,3600 4120,3551.29 ; Q19.3 4120,3551.29
O6: Q21.3 R43.1 R43.2 U16.Hi | length 2568.6
  Top Layer w10: R43.2 R43.1 4646,3631.63 4705,3572.63 4705,3551.29 Q21.3 4715.63,3407.37 4760,3363 5232,3363 5263,3394 5263,4984.83 U16.Hi
P0.0: RN1.5 U1.37 | length 546.6
  Top Layer w10: RN1.5 5748.21,4374.21 5760,4362.42 U1.37
P0.1: RN1.6 U1.36 | length 529.2
  Top Layer w10: RN1.6 5807,4435.35 5848.43,4393.92 U1.36
P0.2: RN1.7 U1.35 | length 529.2
  Top Layer w10: RN1.7 5837.15,4466.85 5878.58,4425.42 U1.35
P0.3: RN1.8 U1.34 | length 529.2
  Top Layer w10: RN1.8 5985.65,4498.35 6027.08,4456.92 U1.34
P0.4: RN2.5 U1.33 | length 177.4
  Top Layer w10: U1.33 6328.54,4610 6332.8,4614.26 RN2.5
P0.5: RN2.6 U1.32 | length 177.4
  Top Layer w10: U1.32 6360.04,4610 6364.2,4614.16 RN2.6
P0.6: RN2.7 U1.31 | length 177.4
  Top Layer w10: U1.31 6391.54,4610 6395.7,4614.16 RN2.7
P0.7: RN2.8 U1.30 | length 177.4
  Top Layer w10: U1.30 6423.04,4610 6427.2,4614.16 RN2.8
P1.0: U1.40
P1.1: R7.2 U1.41 | length 2568.2
  Top Layer w10: R7.2 v1(3866.71,3929.71) ; v1(6138,4237) 6231.42,4237 U1.41
  Bottom Layer w10: v1(3866.71,3929.71) 4193.71,3929.71 4360,4096 4796,4096 4897,4197 6098,4197 v1(6138,4237)
P1.2: R10.2 U1.42 | length 2043
  Top Layer w10: R10.2 v1(4379.3,4020.3) ; v1(6192,4197) 6199.92,4204.92 U1.42
  Bottom Layer w10: v1(4379.3,4020.3) 4428,4069 4861,4069 4969,4177 6172,4177 v1(6192,4197)
P1.3: R14.2 U1.43 | length 1652.8
  Top Layer w10: R14.2 4929.3,3910 4960,3910 4986,3884 v1(4986,3857) ; U1.43 6309,4160 6309,4111.14 v1(6272.86,4075)
  Bottom Layer w10: v1(4986,3857) 5027,3898 5656.41,3898 5840.55,4082.14 6265.73,4082.14 v1(6272.86,4075)
P1.4: R18.2 U1.44 | length 2991.3
  Top Layer w10: v1(3720,3451) 3825,3451 R18.2 ; v1(6036,3975) 6036,4007.7 6170.22,4141.92 U1.44
  Bottom Layer w10: v1(3720,3451) 3867,3598 5163.95,3598 5183,3578.95 5639.95,3578.95 v1(6036,3975)
P1.5: R22.2 U1.1 | length 2609.9
  Top Layer w10: R22.2 4390,3495.95 4377,3482.95 4377,3400 4438,3339 5255,3339 5303,3387 v1(5303,3639) ; v1(6124,4022) 6153,4051 6224,4051 6240,4035 6306.54,4035 6328.54,4057 U1.1
  Bottom Layer w10: v1(5303,3639) 5303,3620 5315,3608 5353,3608 5512,3767 5698,3767 5953,4022 v1(6124,4022)
P1.6: R26.2 U1.2 | length 2035.5
  Top Layer w10: R26.2 4947.95,3480.95 4937,3470 4937,3400 4947,3390 5220,3390 5223,3393 v1(5223,3619) ; v1(6298,3988) 6315,3988 6360.04,4033.04 U1.2
  Bottom Layer w10: v1(5223,3619) 5417,3813 5626,3813 5868,4055 6096,4055 6103.14,4062.14 6223.86,4062.14 v1(6298,3988)
P1.7: U1.3
P2.0: U1.18 U3.1 | length 4000.8
  Top Layer w10: v1(6644,4320) 6654.92,4330.92 U1.18 ; U3.1 10234.42,4645.42 v1(10262,4673)
  Bottom Layer w10: v1(6644,4320) 6659,4335 6840,4335 6882,4293 9200,4293 9438,4531 10120,4531 v1(10262,4673)
P2.1: U1.19 U3.2 | length 3968.6
  Top Layer w10: v1(6599.57,4275.44) 6599.57,4351 6610.99,4362.42 U1.19 ; v1(10184.42,4487) U3.2
  Bottom Layer w10: v1(6599.57,4275.44) 6700.44,4275.44 6740,4315 6828,4315 6871,4272 9210,4272 9425,4487 v1(10184.42,4487)
P2.2: U1.20 U3.3 | length 4164.9
  Top Layer w10: v1(6504,4354) 6543.92,4393.92 U1.20 ; U3.3 v1(10134.42,4715.42)
  Bottom Layer w10: v1(6504,4354) 6555.61,4405.61 6838.19,4405.61 6848.19,4415.61 8115.61,4415.61 8415.42,4715.42 v1(10134.42,4715.42)
P2.3: R35.2 U1.21 | length 3287.6
  Top Layer w10: U1.21 6750,4425.42 6760,4415.42 6760,4295 v1(6780,4275) ; R35.2 9706.94,4276.94 v1(9707,4277)
  Bottom Layer w10: v1(6780,4275) 6884,4171 9601,4171 v1(9707,4277)
P2.4: R36.2 U1.22 | length 3288.2
  Top Layer w10: U1.22 6774,4456.92 6788,4442.92 6788,4327.44 v1(6884.44,4231) ; v1(9538,4335) 9548,4345 9651.42,4345 9666.42,4360 9666.42,4446.94 R36.2
  Bottom Layer w10: v1(6884.44,4231) 9434,4231 v1(9538,4335)
P2.5: R37.2 U1.23 | length 5272.2
  Top Layer w10: U1.23 6643.54,4503 6760,4503 6836.15,4426.85 6836.15,4319.29 6864.44,4291 7047,4304 7047,5160 7112,5225 8813,5225 9204,5616 9561,5616 9597,5580 9597,5310 9487,5200 9487,4839 9616,4710 9616,4616.94 R37.2
P2.6: R33.2 U1.24 | length 4222.9
  Top Layer w10: v1(6444,4151) 6444,4380 6504,4440 6572.04,4440 6612.04,4480 U1.24 ; R33.2 9634.42,3923 9732.42,4021 v1(9791,4021)
  Bottom Layer w10: v1(6444,4151) 6534,4061 6753.57,4061 6926.57,3888 9491,3888 9624,4021 v1(9791,4021)
P2.7: U1.25 U3.6 | length 3836.7
  Top Layer w10: U1.25 6580.54,4560 6594.54,4574 6805,4574 6898,4481 v1(6898,4353) ; U3.6 v1(9984.42,4632)
  Bottom Layer w10: v1(6898,4353) 6938,4313 8932,4313 9251,4632 v1(9984.42,4632)
P3.0: H1.2 U1.5 | length 4728.8
  Top Layer w10: v1(6201,4005) 6260,3946 6414,3946 6454.54,3986.54 U1.5
  Bottom Layer w10: v1(6201,4005) 6166,4005 5937,3776 5893,3776 5833,3716 5833,3460 6008,3285 9207.76,3285 H1.2
P3.1: H1.3 U1.7 | length 3086.8
  Top Layer w10: U1.7 6517.54,4028.57 6585.11,3961 6716,3961 v1(6734,3979)
  Bottom Layer w10: v1(6734,3979) 7395,3318 9140.76,3318 H1.3
P3.2: U1.8
P3.3: U1.9
P3.4: U1.10
P3.5: U1.11
P3.6: U1.12 U9.1 U10.15 | length 2373.4
  Top Layer w10: U9.1 5607.71,3961.29 v1(5873,3696) ; U10.15 6046.71,3836.29 v1(6071,3812) ; v1(6638,4141.92) U1.12
  Bottom Layer w10: v1(5873,3696) 5955,3696 v1(6071,3812) 6605,3812 6673,3880 6673,4020 6652,4041 6480,4041 6404,4117 6404,4180 6415,4191 6541,4191 6590.08,4141.92 v1(6638,4141.92)
P3.7: U1.13 U8.1 U10.16 | length 2371.7
  Top Layer w10: U8.1 5434.66,4082.66 v1(5530.34,4082.66) ; U10.16 6087.71,3886.29 v1(6099,3875) v1(6113,3861) ; v1(6633,4001) 6760,4128 6760,4165 U1.13
  Bottom Layer w10: v1(5530.34,4082.66) 5538.86,4074.14 5760.74,4074.14 5801.6,4115 6303,4115 6338,4080 6338,3948 6265,3875 v1(6099,3875) ; v1(6113,3861) 6520,3861 6633,3974 v1(6633,4001)
P4.0: U1.17
P4.1: U1.28
P4.2: SW2.3 SW2.4 U1.39 | length 2702
  Top Layer w10: U1.39 6111,4299.42 5996,4184.42 5996,3949 6010,3935 6238,3935 6247,3926 6448,3926 6463,3941 6526,3941 6528,3939 7289.7,3939 7707.7,3521 SW2.3 SW2.4
P4.3: R3.1 U1.6 | length 1061
  Top Layer w10: v1(5733,4135) 5747.47,4149.47 R3.1 ; U1.6 6486.04,4233.04 v1(6504,4251)
  Bottom Layer w10: v1(5733,4135) 5753,4155 6231,4155 6327,4251 v1(6504,4251)
P4.4: U1.26
P4.5: U1.27
P4.6: U1.29
RST: C3.2 R1.1 SW1.1 SW1.2 U1.4 | length 2485.6
  Top Layer w10: v1(6388,3986) 6388,4001 6423.04,4036.04 U1.4 ; v1(6499,3901) 7070,3901 7462.3,3508.7 SW1.1 SW1.2 7462.3,3240 7495.21,3207.09 7910.09,3207.09 7970,3267 C3.2 7948.27,3318.73 7937,3330 7937,3410 7975.34,3448.34 R1.1
  Bottom Layer w10: v1(6388,3986) 6414,3986 v1(6499,3901)
S$164: 
SQW: U6.1 U10.3 | length 168.3
  Top Layer w10: U6.1 U10.3
VCC: R5.2 R6.2 R8.2 R9.2 R12.2 R13.2 R16.2 R17.2 R20.2 R21.2 R24.2 R25.2 U5.2 | length 4417.9
  Top Layer w10: R16.2 R17.2 3740,3675 v1(3628.71,3786.29) 3517,3898 3425,3898 3407,3916 3407,4268 3400,4275 3400,4335 3420,4355 3460,4355 3710.29,4104.71 R6.2 R5.2 3937,4104.71 3971.29,4139 4180,4139 4204.29,4114.71 R9.2 R8.2 4444.3,4140 4480.3,4176 4598,4176 ; R21.2 R20.2 4532.12,3660.95 4593,3721.83 4681,3721.83 ; R24.2 R25.2 4751.88,3650.95 4681,3721.83 ; R12.2 R13.2 4785.29,4119.71 4729,4176 4598,4176 ; 4598,4176 4582,4160 4582,4050 4681,3951 4681,3721.83
  Bottom Layer w10: U5.2 v1(3628.71,3786.29)
XTAL1: C5.1 U1.15 X1.2 | length 867.4
  Top Layer w10: U1.15 6749.58,4236.42 6771,4215 6829,4215 6861,4183 6957.45,4183 X1.2 7216.81,4487.53 C5.1
XTAL2: C6.1 U1.14 X1.1 | length 1100.6
  Top Layer w10: U1.14 6748,4204.92 6757.92,4195 6807,4195 6858,4144 7095.81,4144 7391.81,4440 7391.81,4504.73 ; C6.1 7391.81,4504.73 ; X1.1 7391.81,4504.73
pads on no net: U3.7 U10.4 U11.P U12.P U13.P U14.P U15.P U16.P

## Keep-outs
Board Outline Layer:
  lines w10: 3000,3166.69 10874.02,3166.69 10874.02,6316.29 3000,6316.29 3000,3166.69
Multi-Layer:
  circle w10: c3236.22,6080.07 r125.98
  circle w10: c10637.8,6080.07 r125.98
  circle w10: c3236.22,3402.91 r78.78
  circle w10: c10637.8,3402.91 r125.98
  circle w10: c6413.27,3521.29 r29.53
  circle w10: c6708.54,3521.29 r29.53

## Silkscreen, mask and mechanical layers (free items; w line width, h text height)
Mechanical Layer:
  circle w1: c3236.22,6080.07 r125.98
  circle w1: c10637.8,6080.07 r125.98
  circle w1: c3236.22,3402.91 r78.78
  circle w1: c10637.8,3402.91 r125.98

## Text inside footprints (layer, text, board x,y; h text height)
U11: Top Silkscreen Layer "H" at 8691.38,5066.3 h80; Top Silkscreen Layer "0" at 8746.5,5176.54 h80; Top Silkscreen Layer "9" at 8746.5,5326.14 h80; Top Silkscreen Layer "8" at 8754.37,5475.75 h80; Top Silkscreen Layer "7" at 8691.38,5593.86 h80; Top Silkscreen Layer "6" at 8577.2,5617.48 h80; Top Silkscreen Layer "5" at 8455.16,5593.86 h80; Top Silkscreen Layer "4" at 8407.91,5475.75 h80; Top Silkscreen Layer "3" at 8407.91,5326.14 h80; Top Silkscreen Layer "2" at 8407.91,5176.54 h80; Top Silkscreen Layer "1" at 8447.28,5066.3 h80; Top Silkscreen Layer "P" at 8573.27,5042.68 h80
U12: Top Silkscreen Layer "H" at 7510.28,5066.3 h80; Top Silkscreen Layer "0" at 7565.4,5176.54 h80; Top Silkscreen Layer "9" at 7565.4,5326.14 h80; Top Silkscreen Layer "8" at 7573.27,5475.75 h80; Top Silkscreen Layer "7" at 7510.28,5593.86 h80; Top Silkscreen Layer "6" at 7396.1,5617.48 h80; Top Silkscreen Layer "5" at 7274.06,5593.86 h80; Top Silkscreen Layer "4" at 7226.81,5475.75 h80; Top Silkscreen Layer "3" at 7226.81,5326.14 h80; Top Silkscreen Layer "2" at 7226.81,5176.54 h80; Top Silkscreen Layer "1" at 7266.18,5066.3 h80; Top Silkscreen Layer "P" at 7392.17,5042.68 h80
U13: Top Silkscreen Layer "H" at 6329.17,5066.3 h80; Top Silkscreen Layer "0" at 6384.29,5176.54 h80; Top Silkscreen Layer "9" at 6384.29,5326.14 h80; Top Silkscreen Layer "8" at 6392.16,5475.75 h80; Top Silkscreen Layer "7" at 6329.17,5593.86 h80; Top Silkscreen Layer "6" at 6214.99,5617.48 h80; Top Silkscreen Layer "5" at 6092.95,5593.86 h80; Top Silkscreen Layer "4" at 6045.7,5475.75 h80; Top Silkscreen Layer "3" at 6045.7,5326.14 h80; Top Silkscreen Layer "2" at 6045.7,5176.54 h80; Top Silkscreen Layer "1" at 6085.07,5066.3 h80; Top Silkscreen Layer "P" at 6211.06,5042.68 h80
U14: Top Silkscreen Layer "H" at 9872.48,5066.3 h80; Top Silkscreen Layer "0" at 9927.6,5176.54 h80; Top Silkscreen Layer "9" at 9927.6,5326.14 h80; Top Silkscreen Layer "8" at 9935.47,5475.75 h80; Top Silkscreen Layer "7" at 9872.48,5593.86 h80; Top Silkscreen Layer "6" at 9758.3,5617.48 h80; Top Silkscreen Layer "5" at 9636.26,5593.86 h80; Top Silkscreen Layer "4" at 9589.01,5475.75 h80; Top Silkscreen Layer "3" at 9589.01,5326.14 h80; Top Silkscreen Layer "2" at 9589.01,5176.54 h80; Top Silkscreen Layer "1" at 9628.38,5066.3 h80; Top Silkscreen Layer "P" at 9754.37,5042.68 h80
U15: Top Silkscreen Layer "H" at 3966.97,5066.3 h80; Top Silkscreen Layer "0" at 4022.09,5176.54 h80; Top Silkscreen Layer "9" at 4022.09,5326.14 h80; Top Silkscreen Layer "8" at 4029.96,5475.75 h80; Top Silkscreen Layer "7" at 3966.97,5593.86 h80; Top Silkscreen Layer "6" at 3852.79,5617.48 h80; Top Silkscreen Layer "5" at 3730.75,5593.86 h80; Top Silkscreen Layer "4" at 3683.5,5475.75 h80; Top Silkscreen Layer "3" at 3683.5,5326.14 h80; Top Silkscreen Layer "2" at 3683.5,5176.54 h80; Top Silkscreen Layer "1" at 3722.87,5066.3 h80; Top Silkscreen Layer "P" at 3848.86,5042.68 h80
U16: Top Silkscreen Layer "H" at 5148.07,5066.3 h80; Top Silkscreen Layer "0" at 5203.19,5176.54 h80; Top Silkscreen Layer "9" at 5203.19,5326.14 h80; Top Silkscreen Layer "8" at 5211.06,5475.75 h80; Top Silkscreen Layer "7" at 5148.07,5593.86 h80; Top Silkscreen Layer "6" at 5033.89,5617.48 h80; Top Silkscreen Layer "5" at 4911.85,5593.86 h80; Top Silkscreen Layer "4" at 4864.6,5475.75 h80; Top Silkscreen Layer "3" at 4864.6,5326.14 h80; Top Silkscreen Layer "2" at 4864.6,5176.54 h80; Top Silkscreen Layer "1" at 4903.97,5066.3 h80; Top Silkscreen Layer "P" at 5029.96,5042.68 h80; Bottom Silkscreen Layer "0603WAF1002T5E" at 2990.01,6299.69 h29.2 r90